# Altium PCB Board.PcbDoc
Units mm, origin at the board's own origin, x right, y up, seen from the top; angles counter-clockwise.
Board outline 180.09 x 119.89 mm, 2 copper layers (Top Layer, Bottom Layer); 170 components, 132 nets, 592 pads, 0 vias.
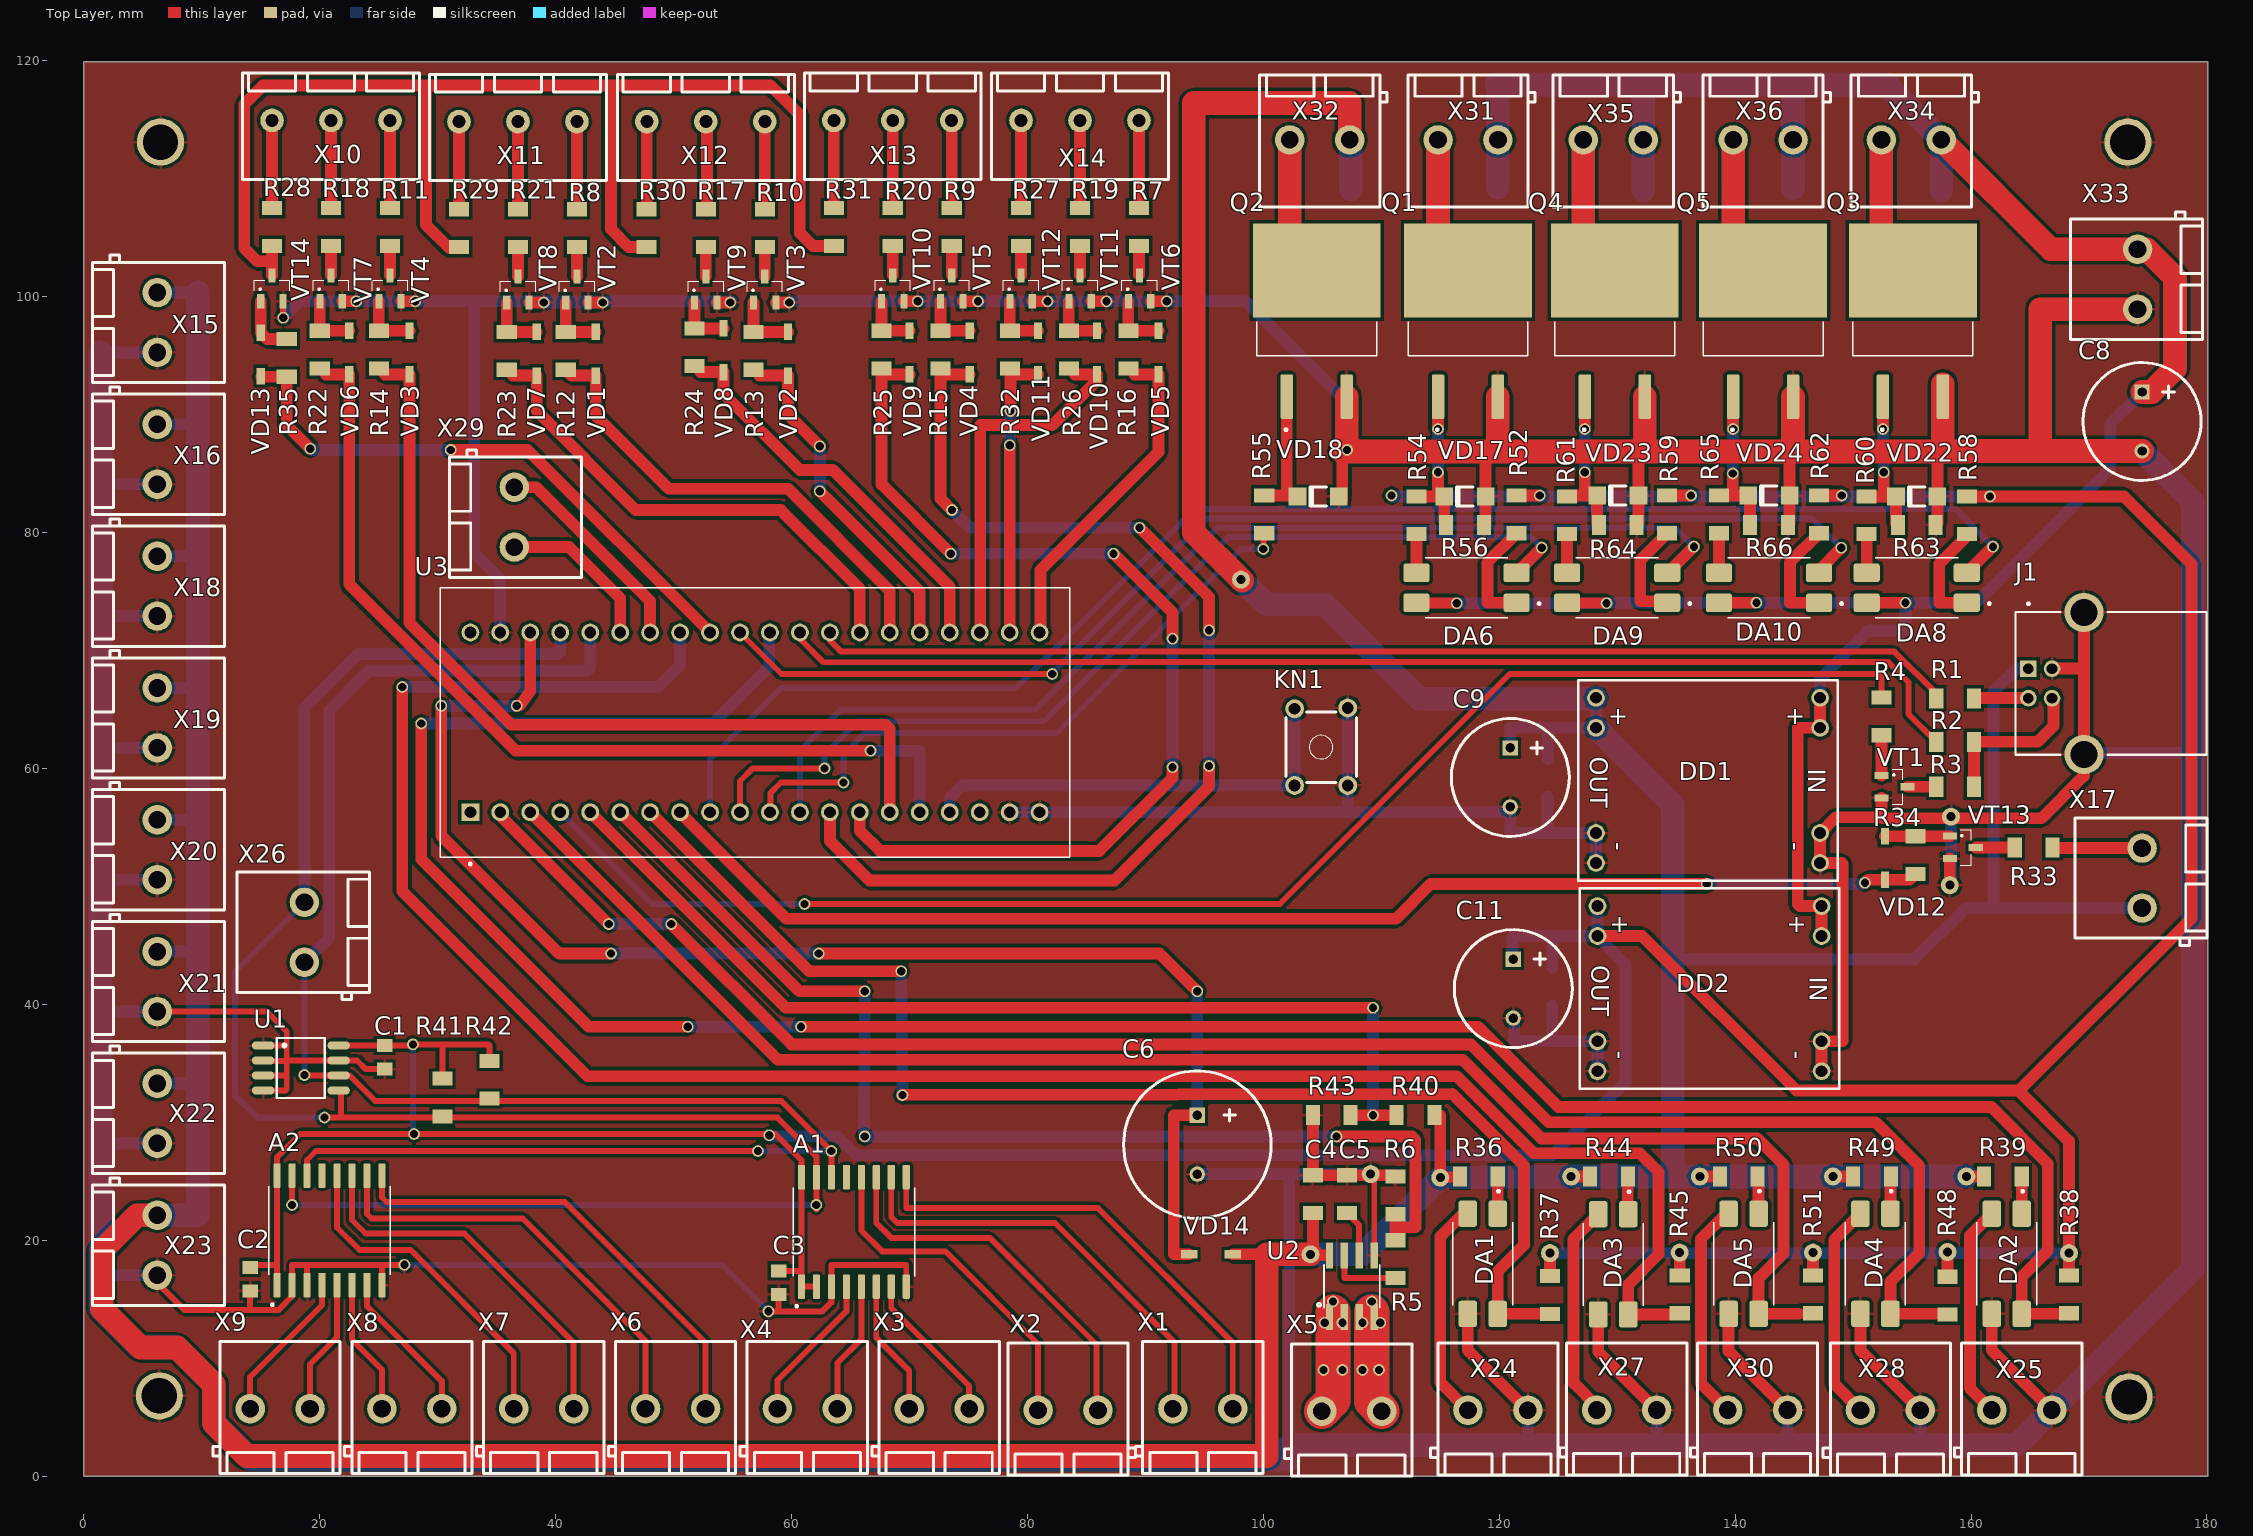
[diagram p0: Top Layer view]
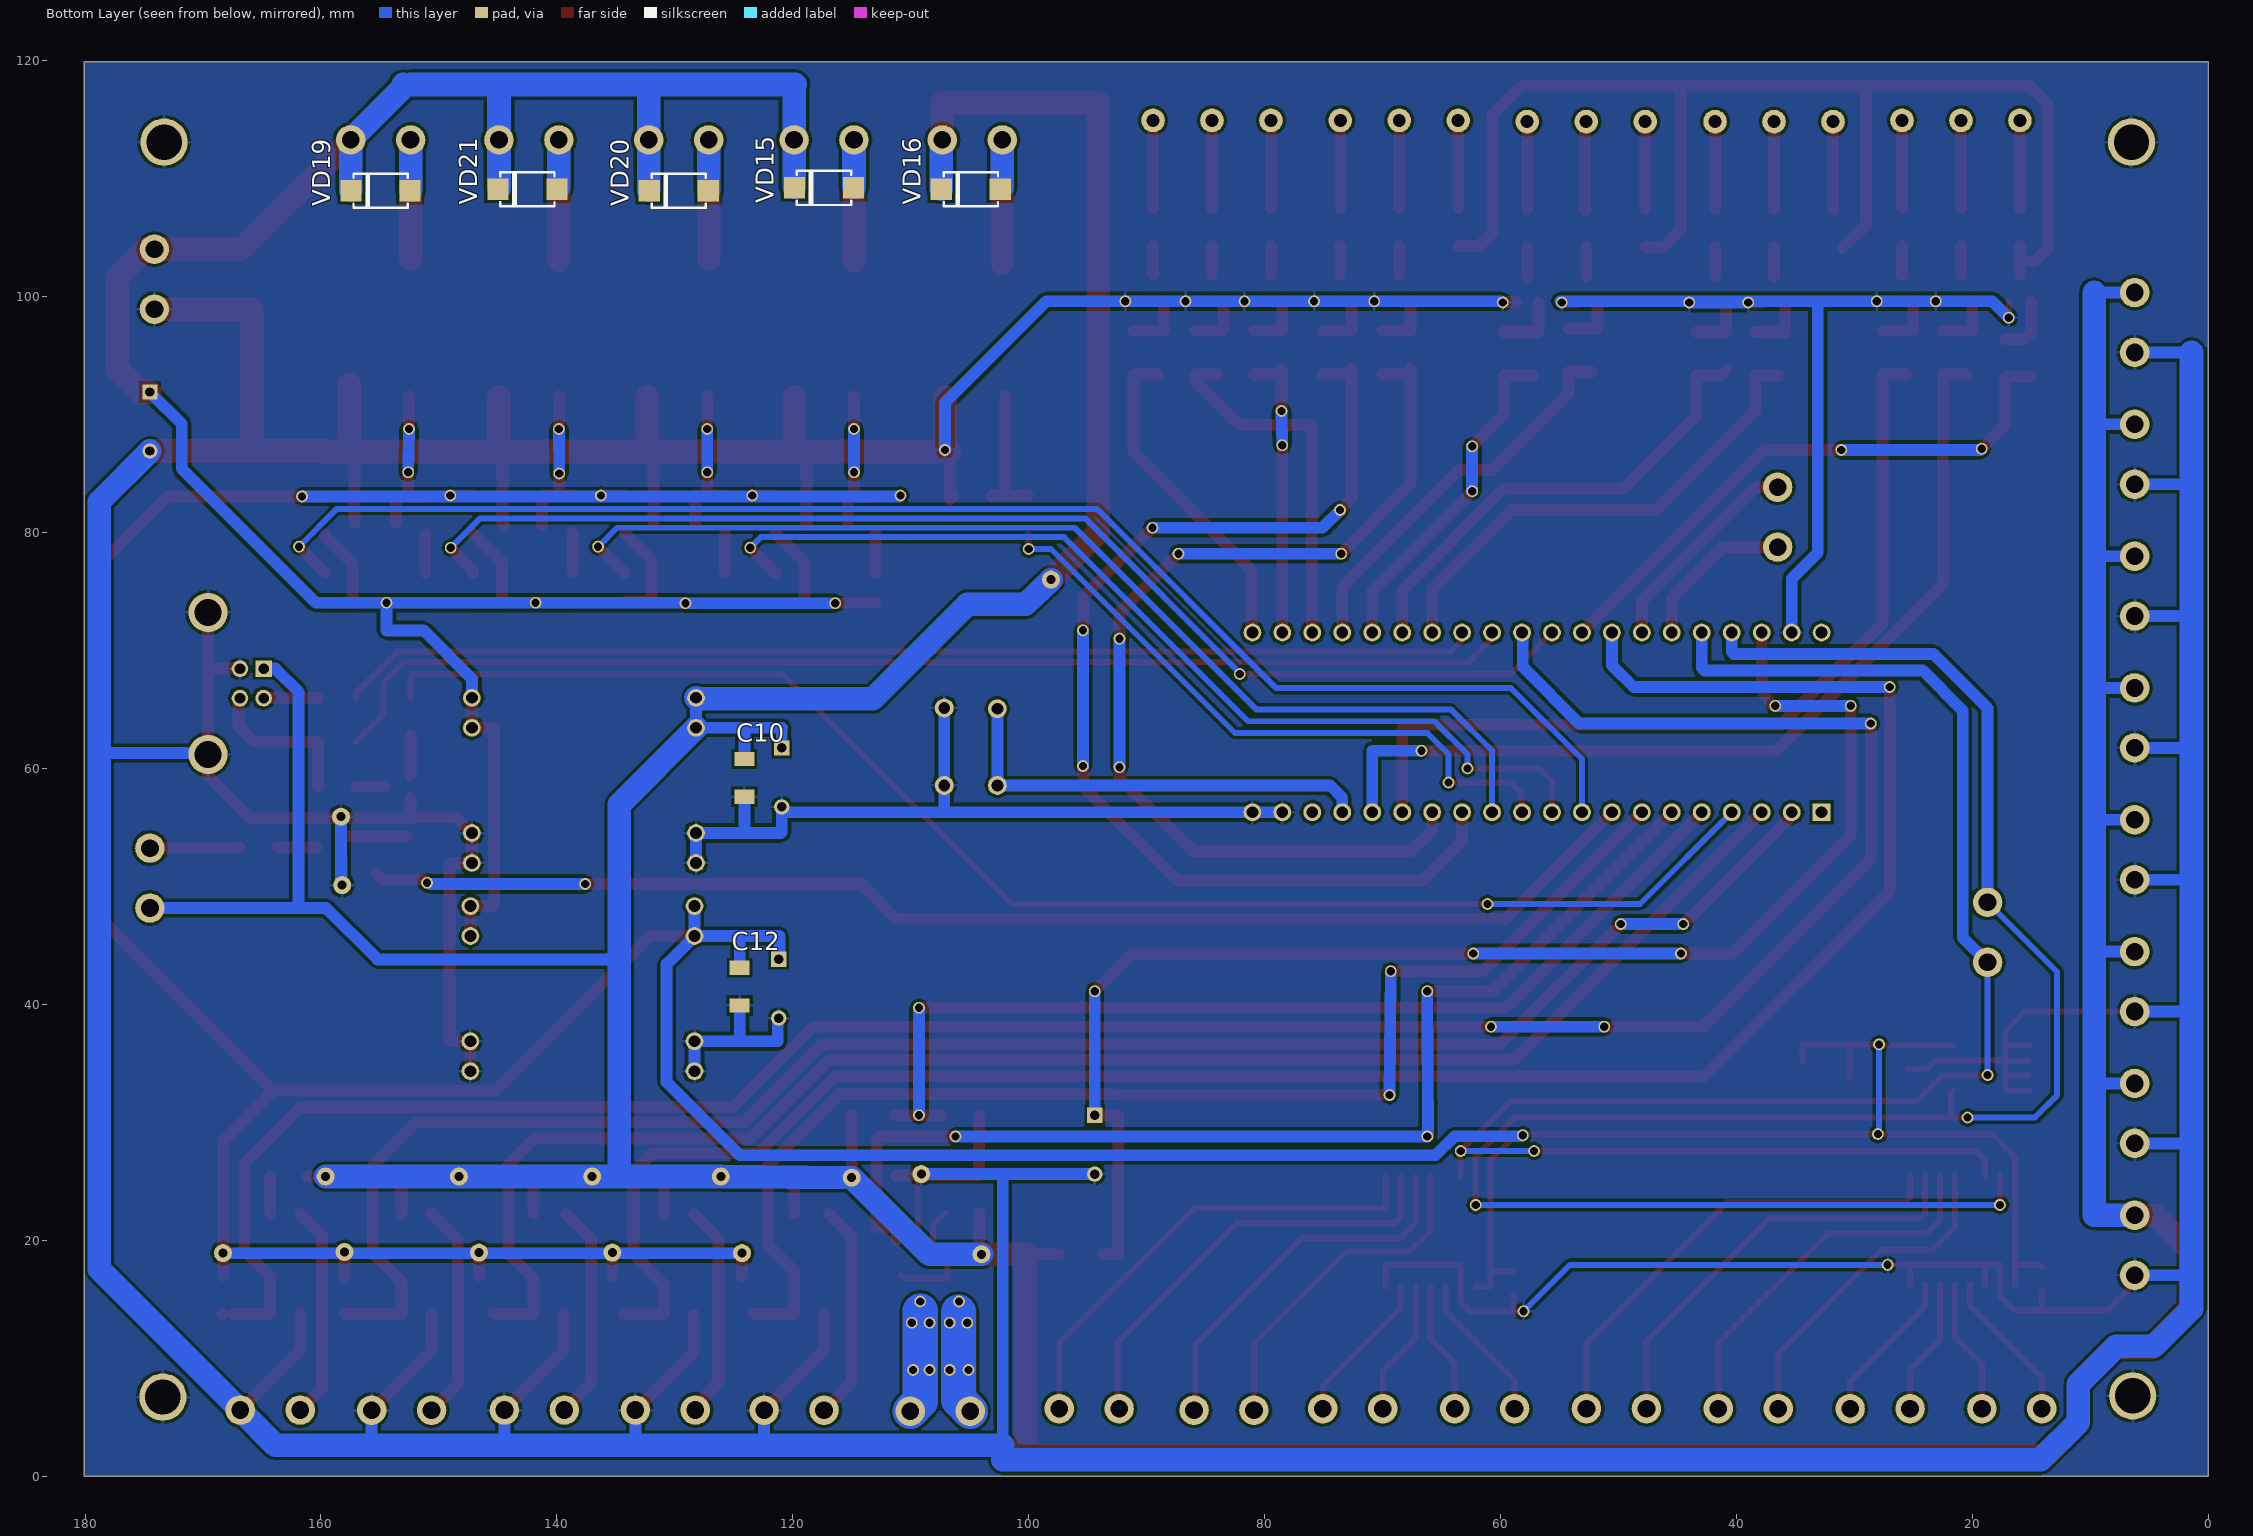
[diagram p1: Bottom Layer view, seen from below]
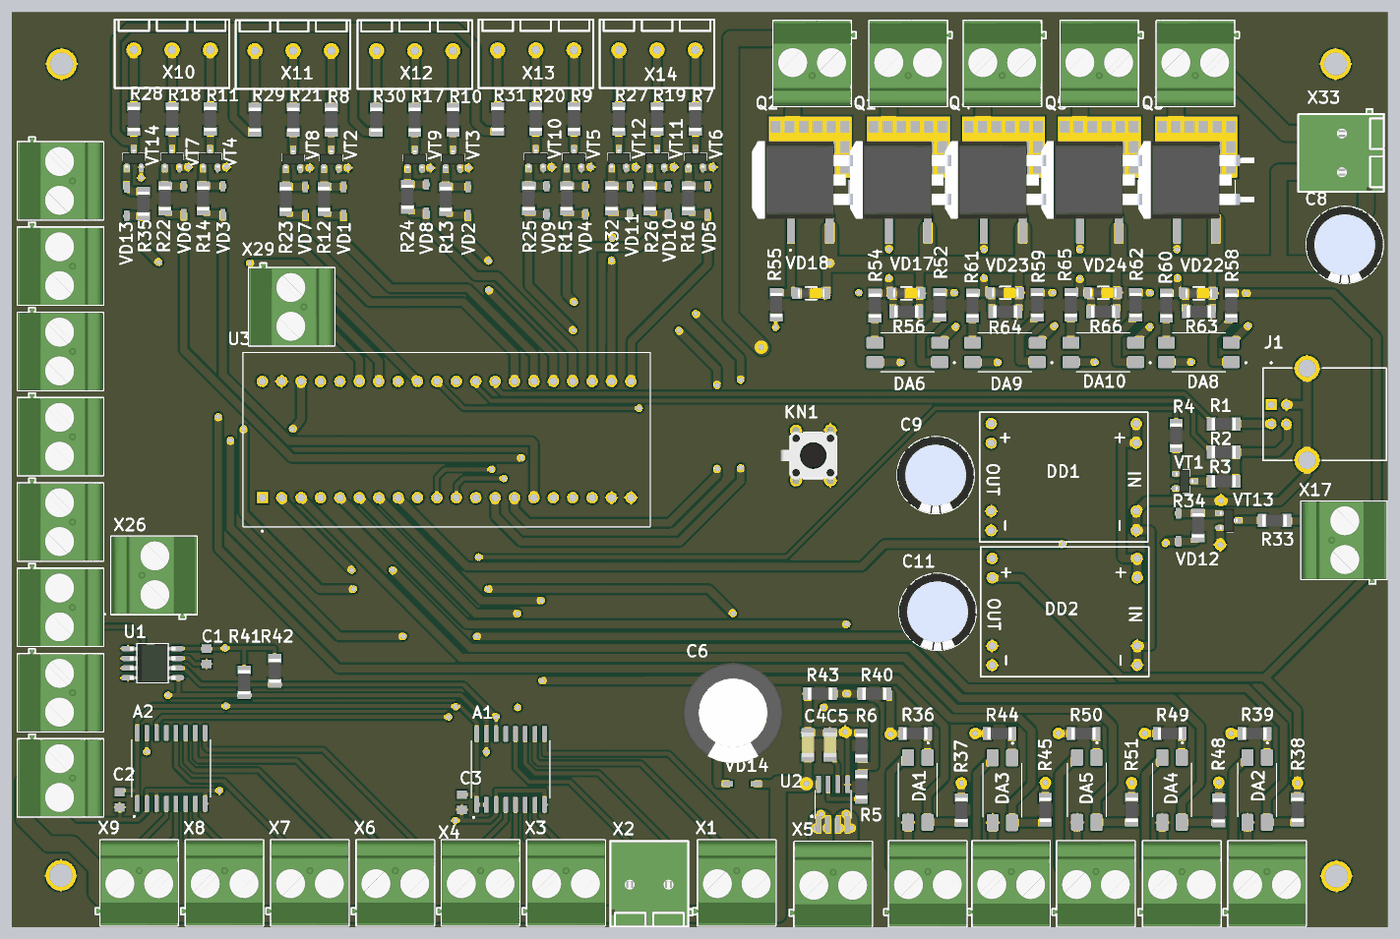
[diagram p2: 3D render of the assembled board from above, using the file's embedded part models]
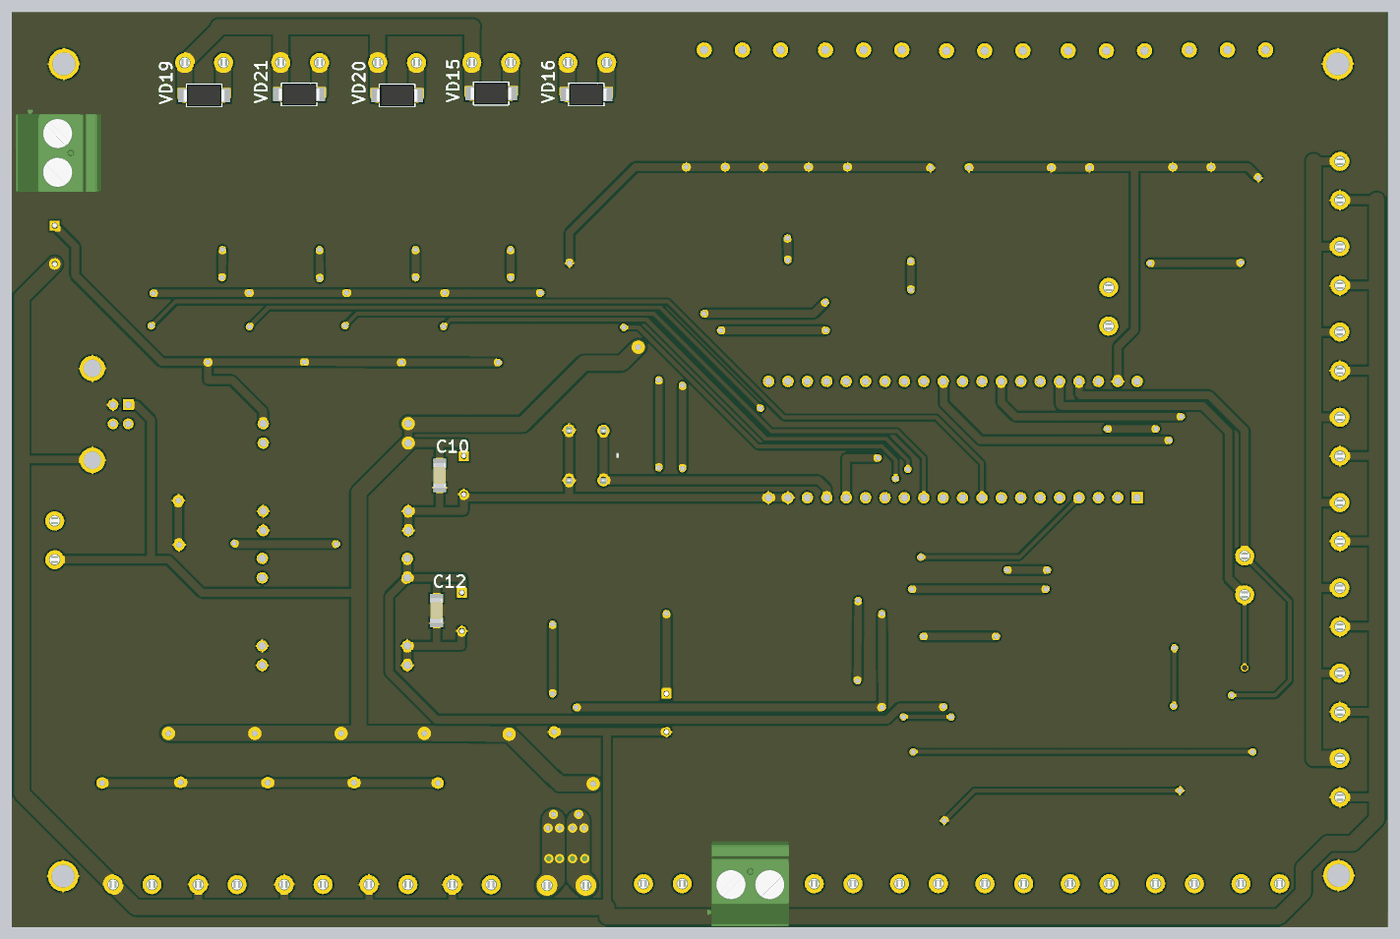
[diagram p3: 3D render of the assembled board from below, using the file's embedded part models]

## Layer stack, top to bottom
Top Solder: solder mask 0.0102, Solder Resist, Dk 3.5
Top Layer: signal copper 0.0356
Dielectric 1: dielectric 0.32, FR-4, Dk 4.8
Bottom Layer: signal copper 0.0356
Bottom Solder: solder mask 0.0102, Solder Resist, Dk 3.5

## Board outline
0,0 180.086,0 180.086,119.888 0,119.888

## Design rules (kind name [scope] priority, off if disabled: settings)
Clearance [All] p1: gap=0.254
PolygonConnect [All] p1: connectstyle=Relief reliefconductorwidth=0.254 reliefentries=4 polygonreliefangle="90 Angle" airgapwidth=0.254
RoomDefinition USB [InComponentClass('USB')] p1: confinementstyle=ConfineIn formatcopy=TRUE lockcomponents=FALSE outline -18.415,279.527 19.939,279.527 19.939,299.212 -18.415,299.212
RoomDefinition STM [InComponentClass('STM')] p2: confinementstyle=ConfineIn formatcopy=TRUE lockcomponents=FALSE outline -18.415,219.202 238.633,219.202 238.633,278.257 -18.415,278.257
RoomDefinition PWR_IN [InComponentClass('PWR_IN')] p3: confinementstyle=ConfineIn formatcopy=TRUE lockcomponents=FALSE outline -18.415,192.913 75.692,192.913 75.692,218.059 -18.415,218.059
RoomDefinition OUT_RELE [InComponentClass('OUT_RELE')] p4: confinementstyle=ConfineIn formatcopy=TRUE lockcomponents=FALSE outline -18.415,170.688 318.516,170.688 318.516,191.643 -18.415,191.643
RoomDefinition OUT_MOT [InComponentClass('OUT_MOT')] p5: confinementstyle=ConfineIn formatcopy=TRUE lockcomponents=FALSE outline -18.415,151.13 466.852,151.13 466.852,169.418 -18.415,169.418
RoomDefinition IN_PIN [InComponentClass('IN_PIN')] p6: confinementstyle=ConfineIn formatcopy=TRUE lockcomponents=FALSE outline -18.415,135.636 163.449,135.636 163.449,149.987 -18.415,149.987
RoutingVias [All] p1: holewidth=0.711 width=1.27 viastyle="Through Hole" minholewidth=0.711 minwidth=1.27 maxholewidth=0.711 maxwidth=1.27
SolderMaskExpansion [All] p1: expansion=0.102
Width [All] p1: maxlimit=3 minlimit=0.254 preferedwidth=0.5
30 further rules are at their usual default settings.

## Classes and differential pairs
component class USB: J1 R1 R2 R3 R4 VT1
component class STM: C6 DA1 DA2 DA3 DA4 DA5 KN1 R36 R37 R38 R39 R40 R41 R42 R43 R44 R45 R48 R49 R50 R51 U3 VD14 X24 X25 X26 X27 X28 X29 X30
component class PWR_IN: C8 C9 C10 C11 C12 DD1 DD2 X33
component class OUT_RELE: DA6 DA8 DA9 DA10 Q1 Q2 Q3 Q4 Q5 R52 R54 R55 R56 R58 R59 R60 R61 R62 R63 R64 R65 R66 VD15 VD16 VD17 VD18 VD19 VD20 VD21 VD22 VD23 VD24 X31 X32 X34 X35 X36
component class OUT_MOT: R7 R8 R9 R10 R11 R12 R13 R14 R15 R16 R17 R18 R19 R20 R21 R22 R23 R24 R25 R26 R27 R28 R29 R30 R31 R32 R33 R34 R35 VD1 VD2 VD3 VD4 VD5 VD6 VD7 VD8 VD9 VD10 VD11 VD12 VD13 VT2 VT3 VT4 VT5 VT6 VT7 VT8 VT9 VT10 VT11 VT12 VT13 VT14 X10 X11 X12 X13 X14 X15 X16 X17 X18 X19 X20 X21 X22 X23
component class IN_PIN: A1 A2 C1 C2 C3 C4 C5 R5 R6 U1 U2 X1 X2 X3 X4 X5 X6 X7 X8 X9

## Components (designator, comment, footprint, x,y, rotation, side; value= is the part's Value field where it differs from the comment)
A1 "PCF8574DW" SOIC127P1030X265-16N 65.278,20.701 r90 top
A2 "PCF8574DW" SOIC127P1030X265-16N 20.828,20.828 r90 top
C1 "0.1 мкФ" C_0805 25.5,35.505 r270 top
C2 "0.1 мкФ" C_0805 14.1,16.7 r270 top
C3 "0.1 мкФ" C_0805 58.9,16.4 r270 top
C4 "0.1 мкФ" C_1206 104.2,23.9 r90 top
C5 "0.1 мкФ" C_1206 107.1,23.9 r90 top
C6 "1000 мкФ" C_12.5x5 94.4,28.1 r270 top
C8 "1000 мкФ" C_10x5 174.498,89.408 r270 top
C9 "1000 мкФ" C_10x5 120.936,59.234 r270 top
C10 "0.1мкФ" C_1206 124.1,59.2 r270 bottom
C11 "1000 мкФ" C_10x5 121.19,41.327 r270 top
C12 "0.1мкФ" C_1206 124.5,41.5 r270 bottom
DA1 "PC817" SOIC254P1000X400-4N 118.6,18 r270 top
DA2 "PC817" SOIC254P1000X400-4N 163.03,18 r270 top
DA3 "PC817" SOIC254P1000X400-4N 129.667,17.955 r270 top
DA4 "PC817" SOIC254P1000X400-4N 151.892,18 r270 top
DA5 "PC817" SOIC254P1000X400-4N 140.716,18 r270 top
DA6 "PC817" SOIC254P1000X400-4N 117.221,75.311 r180 top
DA8 "PC817" SOIC254P1000X400-4N 155.394,75.311 r180 top
DA9 "PC817" SOIC254P1000X400-4N 129.994,75.311 r180 top
DA10 "PC817" SOIC254P1000X400-4N 142.867,75.311 r180 top
DD1 "LM2596" LM2596 137.7,58.98 r270 top
DD2 "LM2596" LM2596 137.827,41.327 r270 top
J1 "USBB" SAMTEC_USB-B-S-X-X-TH 169.564,67.206 r90 top
KN1 "TS-A2PG-130" TS-A2PG-130 104.9,61.8 r270 top
Q1 "IRFZ44N" DPAK254P1524X483-3N 117.348,97.917 r90 top
Q2 "IRFZ44N" DPAK254P1524X483-3N 104.521,97.917 r90 top
Q3 "IRFZ44N" DPAK254P1524X483-3N 155.067,97.917 r90 top
Q4 "IRFZ44N" DPAK254P1524X483-3N 129.794,97.917 r90 top
Q5 "IRFZ44N" DPAK254P1524X483-3N 142.367,97.917 r90 top
R1 "100" R_1206 158.642,65.936 r0 top
R2 "100" R_1206 158.642,62.253 r0 top
R3 "1.5K" R_1206 158.642,58.443 r180 top
R4 "1K" R_1206 152.419,64.412 r270 top
R5 "5.1K" R_1206 111.2,18.4 r90 top
R6 "10K" R_1206 111.2,23.8 r90 top
R7 "130" R_1206 89.455,105.9 r90 top
R8 "130" R_1206 41.805,105.8 r90 top
R9 "130" R_1206 73.58,105.9 r90 top
R10 "130" R_1206 57.73,105.8 r90 top
R11 "130" R_1206 25.955,105.9 r90 top
R12 "130" R_1206 40.855,95.4 r90 top
R13 "130" R_1206 56.78,95.4 r90 top
R14 "130" R_1206 25.005,95.5 r90 top
R15 "130" R_1206 72.63,95.5 r90 top
R16 "130" R_1206 88.55,95.5 r90 top
R17 "130" R_1206 52.73,105.8 r90 top
R18 "130" R_1206 20.955,105.9 r90 top
R19 "130" R_1206 84.455,105.9 r90 top
R20 "130" R_1206 68.58,105.9 r90 top
R21 "130" R_1206 36.805,105.8 r90 top
R22 "130" R_1206 20,95.5 r90 top
R23 "130" R_1206 35.855,95.4 r90 top
R24 "130" R_1206 51.78,95.7 r90 top
R25 "130" R_1206 67.63,95.5 r90 top
R26 "130" R_1206 83.505,95.5 r90 top
R27 "130" R_1206 79.455,105.9 r90 top
R28 "130" R_1206 15.955,105.9 r90 top
R29 "130" R_1206 31.805,105.8 r90 top
R30 "130" R_1206 47.7,105.8 r90 top
R31 "130" R_1206 63.58,105.9 r90 top
R32 "130" R_1206 78.505,95.5 r90 top
R33 "0" R_1206 165.3,53.3 r180 top
R34 "130" R_1206 155.3,52.65 r90 top
R35 "130" R_1206 17.2,94.8 r90 top
R36 "360" R_1206 118.27,25.4 r0 top
R37 "100" R_1206 124.3,15.355 r270 top
R38 "100" R_1206 168.3,15.4 r270 top
R39 "360" R_1206 162.7,25.4 r0 top
R40 "5.1K" R_1206 112.9,30.6 r180 top
R41 "10K" R_1206 34.4,33.6 r270 top
R42 "10K" R_1206 30.4,32.1 r270 top
R43 "10K" R_1206 105.8,30.6 r0 top
R44 "360" R_1206 129.3,25.4 r0 top
R45 "100" R_1206 135.3,15.4 r270 top
R48 "100" R_1206 158,15.3 r270 top
R49 "360" R_1206 151.6,25.4 r0 top
R50 "360" R_1206 140.3,25.4 r0 top
R51 "100" R_1206 146.6,15.4 r270 top
R52 "100" R_1206 121.466,81.534 r270 top
R54 "3K" R_1206 112.976,81.458 r270 top
R55 "3K" R_1206 100.076,81.534 r270 top
R56 "2.2K" R_1206 117.094,80.645 r180 top
R58 "100" R_1206 159.639,81.458 r270 top
R59 "100" R_1206 134.239,81.534 r270 top
R60 "3K" R_1206 151.149,81.458 r270 top
R61 "3K" R_1206 125.749,81.458 r270 top
R62 "100" R_1206 147.112,81.534 r270 top
R63 "2.2K" R_1206 155.394,80.645 r180 top
R64 "2.2K" R_1206 130.048,80.645 r180 top
R65 "3K" R_1206 138.622,81.534 r270 top
R66 "2.2K" R_1206 142.867,80.645 r180 top
U1 "AT24C256C-SSHL-B" SOIC8 18.4,34.6 r0 top
U2 "ACS712" SO08 107.5,16.1 r0 top
U3 "STM32F103-BluePill" MODULE_ZC323000 56.9,63.9 r90 top
VD1 "MBR0520LT1G" SOD-123 43.4,95.15 r270 top
VD2 "MBR0520LT1G" SOD-123 59.7,95.15 r270 top
VD3 "MBR0520LT1G" SOD-123 27.6,95.25 r270 top
VD4 "MBR0520LT1G" SOD-123 75.1,95.25 r270 top
VD5 "MBR0520LT1G" SOD-123 91.1,95.25 r270 top
VD6 "MBR0520LT1G" SOD-123 22.495,95.25 r270 top
VD7 "MBR0520LT1G" SOD-123 38.4,95.15 r270 top
VD8 "MBR0520LT1G" SOD-123 54.23,95.45 r270 top
VD9 "MBR0520LT1G" SOD-123 70,95.25 r270 top
VD10 "MBR0520LT1G" SOD-123 85.9,95.25 r270 top
VD11 "MBR0520LT1G" SOD-123 80.9,95.25 r270 top
VD12 "MBR0520LT1G" SOD-123 152.7,52.4 r270 top
VD13 "MBR0520LT1G" SOD-123 15,95.1 r270 top
VD14 "1N4148W" SOD-123 95.559,18.8 r180 top
VD15 "SMA4007" "SMA (DO-214AC)" 117.348,109.22 r0 bottom
VD16 "SMA4007" "SMA (DO-214AC)" 104.902,109.093 r0 bottom
VD17 "3.9В" DL-35 117.094,83.058 r180 top
VD18 "3.9В" DL-35 104.648,83.058 r180 top
VD19 "SMA4007" "SMA (DO-214AC)" 154.94,108.966 r0 bottom
VD20 "SMA4007" "SMA (DO-214AC)" 129.667,108.966 r0 bottom
VD21 "SMA4007" "SMA (DO-214AC)" 142.494,109.093 r0 bottom
VD22 "3.9В" DL-35 155.394,83.058 r180 top
VD23 "3.9В" DL-35 130.048,83.134 r180 top
VD24 "3.9В" DL-35 142.867,83.134 r180 top
VT1 "BC847" SOT23 153.519,58.443 r0 top
VT2 "2N7002.215" SOT23 41.805,100.6 r90 top
VT3 "2N7002.215" SOT23 57.73,100.6 r90 top
VT4 "2N7002.215" SOT23 25.955,100.7 r90 top
VT5 "2N7002.215" SOT23 73.58,100.7 r90 top
VT6 "2N7002.215" SOT23 89.5,100.7 r90 top
VT7 "2N7002.215" SOT23 20.955,100.7 r90 top
VT8 "2N7002.215" SOT23 36.805,100.6 r90 top
VT9 "2N7002.215" SOT23 52.73,100.6 r90 top
VT10 "2N7002.215" SOT23 68.58,100.7 r90 top
VT11 "2N7002.215" SOT23 84.455,100.7 r90 top
VT12 "2N7002.215" SOT23 79.455,100.7 r90 top
VT13 "2N7002.215" SOT23 159.3,53.3 r0 top
VT14 "2N7002.215" SOT23 15.95,100.7 r90 top
X1 "DG508V-02" DG508V-02 94.869,5.715 r0 top
X2 "DG508V-02" DG508V-02 83.439,5.588 r180 top
X3 "DG508V-02" DG508V-02 72.517,5.715 r0 top
X4 "DG508V-02" DG508V-02 61.341,5.715 r0 top
X5 "DG508V-02" DG508V-02 107.5,5.5 r0 top
X6 "DG508V-02" DG508V-02 50.165,5.715 r0 top
X7 "DG508V-02" DG508V-02 38.989,5.715 r0 top
X8 "DG508V-02" DG508V-02 27.813,5.715 r0 top
X9 "DG508V-02" DG508V-02 16.637,5.715 r0 top
X10 "300-031-12" 300-031-12 20.955,114.935 r180 top
X11 "300-031-12" 300-031-12 36.805,114.835 r180 top
X12 "300-031-12" 300-031-12 52.73,114.835 r180 top
X13 "300-031-12" 300-031-12 68.58,114.935 r180 top
X14 "300-031-12" 300-031-12 84.455,114.935 r180 top
X15 "DG508V-02" DG508V-02 6.223,97.805 r270 top
X16 "DG508V-02" DG508V-02 6.223,86.629 r270 top
X17 "DG508V-02" DG508V-02 174.5,50.7 r90 top
X18 "DG508V-02" DG508V-02 6.223,75.453 r270 top
X19 "DG508V-02" DG508V-02 6.223,64.277 r270 top
X20 "DG508V-02" DG508V-02 6.223,53.101 r270 top
X21 "DG508V-02" DG508V-02 6.223,41.925 r270 top
X22 "DG508V-02" DG508V-02 6.223,30.749 r270 top
X23 "DG508V-02" DG508V-02 6.223,19.573 r270 top
X24 "DG508V-02" DG508V-02 119.888,5.588 r0 top
X25 "DG508V-02" DG508V-02 164.3,5.6 r0 top
X26 "DG508V-02" DG508V-02 18.7,46.1 r90 top
X27 "DG508V-02" DG508V-02 130.8,5.6 r0 top
X28 "DG508V-02" DG508V-02 153.162,5.588 r0 top
X29 "DG508V-02" DG508V-02 36.5,81.3 r270 top
X30 "DG508V-02" DG508V-02 141.9,5.6 r0 top
X31 "DG508V-02" DG508V-02 117.348,113.284 r180 top
X32 "DG508V-02" DG508V-02 104.775,113.284 r180 top
X33 "DG508V-02" DG508V-02 174.117,101.473 r270 top
X34 "DG508V-02" DG508V-02 154.94,113.284 r180 top
X35 "DG508V-02" DG508V-02 129.667,113.284 r180 top
X36 "DG508V-02" DG508V-02 142.367,113.284 r180 top

## Footprints (in the part's own frame and the unit in brackets; to place one, negate y for a bottom-side part, rotate by r counter-clockwise, add the part's x,y. Pads: shape width x height; smd on the part's side, far side on the other; paste and mask are expansions set on the pad)
300-031-12 [mm] "шаг 5 мм"
  round 2 hole 1.1: 1(-5,0) 2(0,0) 3(5,0)
  silkscreen extent -7.5,-4 7.5,5
C_10x5 [mm] "в отверстие"
  rect 1.3x1.3 hole 0.8: 1(-2.5,0)
  round 1.3 hole 0.8: 2(2.5,0)
  silkscreen extent -5,-5 5,5, body extent -5.04,-5.06 5.08,5.06, height 13.2
C_12.5x5 [mm] "в отверстие"
  rect 1.3x1.3 hole 0.8: 1(-2.5,0)
  round 1.3 hole 0.8: 2(2.5,0)
  silkscreen extent -6.25,-6.25 6.25,6.25, body extent -6.6,-6.6 6.6,6.6, height 25.4
C_0805 [mm] "SMD"
  rect 1.1x1.3 smd: 1(-1,0) 2(1,0)
  body extent -1,-0.62 1,0.63, height 0.6
C_1206 [mm] "SMD"
  rect 1.2x1.7 smd: 1(-1.6,0) 2(1.6,0)
  body extent -1.6,-0.8 1.6,0.8, height 0.76
DG508V-02 [mm] "шаг 5,08 мм"
  round 2.5 hole 1.5: 1(-2.54,0) 2(2.54,0)
  silkscreen extent -5.7,-5.5 5.1,5.7, body extent -5.63,-5.5 5.1,5.7, height 18.3
DL-35 [mm] "SMD"
  rect 1.5x1.5 smd: 1(-1.75,0) 2(1.75,0)
  silkscreen extent -0.7,-0.8 0.7,0.8, body extent -1.75,-0.75 1.75,0.75, height 1.49
DPAK254P1524X483-3N [mm]
  rrect25% 3.78x1.06 smd: 1(-6.4,2.54) 3(-6.4,-2.54)
  rect 8x10.84 smd paste-6: 2(4.29,0)
  silkscreen extent -9.3,-5.08 -0.05,5.08, body extent -5.08,-7.62 5.08,7.62, height 4.83
LM2596 [mm] "Модуль DC-DC"
  round 1.5 hole 1: 1(-7,9.5) 2(-4.46,9.5) 3(4.46,9.5) 4(7,9.5) 5(-7,-9.5) 6(-4.46,-9.5) 7(4.46,-9.5) 8(7,-9.5)
  silkscreen extent -8.5,-11 8.5,11
MODULE_ZC323000 [mm]
  rect 1.508x1.508 hole 1: 1(-7.62,24.13)
  round 1.508 hole 1: 2(-7.62,21.59) 3(-7.62,19.05) 4(-7.62,16.51) 5(-7.62,13.97) 6(-7.62,11.43) 7(-7.62,8.89) 8(-7.62,6.35) 9(-7.62,3.81) 10(-7.62,1.27) 11(-7.62,-1.27) 12(-7.62,-3.81) 13(-7.62,-6.35) 14(-7.62,-8.89) 15(-7.62,-11.43) 16(-7.62,-13.97) 17(-7.62,-16.51) 18(-7.62,-19.05) 19(-7.62,-21.59) 20(-7.62,-24.13) 21(7.62,-24.13) 22(7.62,-21.59) 23(7.62,-19.05) 24(7.62,-16.51) 25(7.62,-13.97) 26(7.62,-11.43) 27(7.62,-8.89) 28(7.62,-6.35) 29(7.62,-3.81) 30(7.62,-1.27) 31(7.62,1.27) 32(7.62,3.81) 33(7.62,6.35) 34(7.62,8.89) 35(7.62,11.43) 36(7.62,13.97) 37(7.62,16.51) 38(7.62,19.05) 39(7.62,21.59) 40(7.62,24.13)
  silkscreen extent -12.1,-26.67 11.43,26.67
R_1206 [mm] "SMD"
  rect 1.2x1.7 smd: 1(-1.6,0) 2(1.6,0)
  body extent -1.6,-0.8 1.6,0.8, height 0.6
SAMTEC_USB-B-S-X-X-TH [mm]
  rect 1.408x1.408 hole 0.9: 1(1.25,4.7)
  round 1.408 hole 0.9: 2(-1.25,4.7) 3(-1.25,2.7) 4(1.25,2.7)
  round 3.316 hole 2.3: S1(-6.02,0) S2(6.02,0)
  silkscreen extent -6.05,-10.4 6.85,5.8
"SMA (DO-214AC)" [mm] "SMD"
  rect 1.8x1.8 smd: A(-2.5,0) K(2.5,0)
  silkscreen extent -2.3,-1.45 2.3,1.45, body extent -2.8,-1.45 2.8,1.45, height 2.4
SO08 [mil]
  rect 24x87 smd: 1(-75,-103) 2(-25,-103) 3(25,-103) 4(75,-103) 5(75,103) 6(25,103) 7(-25,103) 8(-75,103)
  silkscreen extent -115,-71 93,71
SOD-123 [mm] "SMD"
  rect 1.4x0.7 smd: A(-1.85,0) K(1.85,0)
  body extent -1.95,-0.9 1.95,0.9, height 1.18
SOIC8 [mm]
  oval 1.9x0.7 smd: 1(-3.2,1.905) 2(-3.2,0.635) 3(-3.2,-0.635) 4(-3.2,-1.905) 5(3.2,-1.905) 6(3.2,-0.635) 7(3.2,0.635) 8(3.2,1.905)
  silkscreen extent -2.03,-2.54 2.03,2.54, body extent -3,-2.54 3,2.54, height 1.7
SOIC127P1030X265-16N [mm]
  rrect25% 2.06x0.6 smd: 1(-4.64,4.445) 2(-4.64,3.175) 3(-4.64,1.905) 4(-4.64,0.635) 5(-4.64,-0.635) 6(-4.64,-1.905) 7(-4.64,-3.175) 8(-4.64,-4.445) 9(4.64,-4.445) 10(4.64,-3.175) 11(4.64,-1.905) 12(4.64,-0.635) 13(4.64,0.635) 14(4.64,1.905) 15(4.64,3.175) 16(4.64,4.445)
  silkscreen extent -6.4,-5.15 3.75,5.15
SOIC254P1000X400-4N [mm]
  rrect25% 2.22x1.57 smd: 1(-4.245,1.27) 2(-4.245,-1.27) 3(4.245,-1.27) 4(4.245,1.27)
  silkscreen extent -6.25,-2.54 3.5,2.54
SOT23 [mm] "SMD"
  rect 1.2x0.6 smd: 1(-1.1,0.95) 2(-1.1,-0.95) 3(1.1,0)
  silkscreen extent -0.2,-1.5 0.7,1.5, body extent -1.15,-1.5 1.15,1.5, height 1.1
TS-A2PG-130 [mm] "Кнопка 5 мм"
  round 1.6 hole 1: 1(-3.32,2.25) 2(3.25,2.25) 3(-3.25,-2.25) 4(3.25,-2.25)
  silkscreen extent -3,-3 3,3, body extent -3.75,-4.25 3.75,3, height 5

## Part data
A1 A2: "Remote 8-Bit I/O Expander for I2C-Bus 16-SOIC -40 to 85"
C1 C2 C3: library part "Конденсатор 0805", "SMD"
C4 C5: library part "Конденсатор 0603", "SMD"
C6: library part "Конденсатор 16х7.5", "К50-35"
C8 C9 C11: library part "Конденсатор 25х12.5", "К50-35"
C10 C12: library part "Конденсатор 1210", "SMD"
DA1 DA2 DA3 DA4 DA5 DA6 DA8 DA9 DA10: library part KPC357NT, "оптрон, SMD"
DD1 DD2: "Блок питания"
J1: library part USB-B-S-X-X-TH, "USB-B (USB TYPE-B) USB 2.0 Receptacle Connector 4 Position Through Hole, Right Angle"
KN1: library part "TS-A2PG-130 (5-й вывод)", "Кнопка 5 мм"
Q1 Q2 Q3 Q4 Q5: library part IRFZ44NSTRRPBF, "N-Channel 55V 49A (Tc) 3.8W (Ta), 94W (Tc) Surface Mount D2PAK"
R1 R2 R3 R4 R5 R6 R7 R8 R9 R10 R11 R12 R13 R14 R15 R16 R17 R18 R19 R20 R21 R22 R23 R24 R25 R26 R27 R28 R29 R30 R31 R32 R33 R34 R35 R36 R37 R38 R39 R40 R41 R42 R43 R44 R45 R48 R49 R50 R51 R52 R54 R55 R56 R58 R59 R60 R61 R62 R63 R64 R65 R66: library part "Резистор 1206", "0,25 Вт"
U1: "EEPROM Memory IC 256Kb _32K x 8_ IA?C 1MHz 550ns 8-SOIC"
U2: "Current Sensor 5A 1 Channel Hall Effect, Open Loop Bidirectional 8-SOIC (0.154, 3.90mm Width)"
U3: library part ZC323000, "STM32F103C8T6 ARM STM32 Minimum System Development Board Module For Arduino"
VD1 VD2 VD3 VD4 VD5 VD6 VD7 VD8 VD9 VD10 VD11 VD12 VD13 VD15 VD16 VD19 VD20 VD21: library part SMA400*, "диод, SMD"
VD14: "диод, SMD"
VD17 VD18 VD22 VD23 VD24: library part BZV55C***, "стабилитрон, SMD"
VT1: "NPN, SMD"
VT2 VT3 VT4 VT5 VT6 VT7 VT8 VT9 VT10 VT11 VT12 VT13 VT14: "MOSFET, SOT23"
X1 X2 X3 X4 X5 X6 X7 X8 X9 X15 X16 X17 X18 X19 X20 X21 X22 X23 X24 X25 X26 X27 X28 X29 X30 X31 X32 X33 X34 X35 X36: "клеммник винтовой 2к.,5.08мм"
X10 X11 X12 X13 X14: "клеммник винтовой 3к.,5мм"

## Free pads (board coordinates)
  round 1 hole 0.7: 2(17.653,22.987) 3(62.103,22.987) 4(27.9,36.6) 4(28,29) 4(57.15,27.559) 4(58.1,28.9) 5(63.373,27.559) 6(27.178,17.907) 7(58.039,13.97) 10(114.808,88.773) 11(127.254,88.773) 12(139.827,88.773) 13(152.527,88.773) 14(114.8,85.1) 15(127.254,85.1) 16(139.8,85) 17(152.6,85.1) 18(110.866,83.134) 19(123.434,83.134) 20(136.266,83.134) 21(149.034,83.134) 22(161.6,83.058) 28(154.441,74.041) 29(141.8,74.041) 30(129.1,74) 31(116.4,74) 33(105.2,13) 34(106.7,13) 35(108.4,13) 36(109.9,13) 37(105.1,9) 38(106.7,9) 39(108.4,9) 40(109.8,9) 41(105.9,14.8) 42(109.2,14.8) 58(16.9,98.2) 60(91.8,99.6) 61(86.7,99.6) 63(81.7,99.6) 64(75.8,99.6) 65(70.7,99.6) 66(44,99.5) 67(39,99.5) 68(59.8,99.5) 69(54.8,99.5) 70(28.1,99.6) 71(23.1,99.6) 72(107.1,87) 73(161.858,78.8) 74(149,78.7) 75(136.5,78.8) 76(123.6,78.715) 77(100,78.6) 80(78.5,87.4) 81(78.562,90.3) 82(62.4,87.3) 83(62.4,83.5) 84(66.7,61.5) 86(31.1,87) 87(19.2,87.1) 88(44.5,46.8) 89(49.8,46.8) 90(69.4,32.3) 91(69.3,42.8) 92(106.2,28.8) 93(66.2,41.1) 94(66.2,28.8) 95(82.1,68) 96(61.1,48.5) 97(109.3,30.6) 98(151,50.3) 99(137.6,50.2) 100(62.8,60) 101(64.4,58.8) 102(109.3,39.7) 103(94.4,41.1) 104(62.3,44.3) 105(44.7,44.3) 106(60.8,38.1) 107(51.2,38.1) 108(30.3,65.3) 109(36.7,65.3) 110(27,66.9) 112(28.6,63.8) 113(73.5,78.2) 114(73.6,81.9) 115(89.5,80.4) 116(87.3,78.2) 117(95.4,71.7) 118(92.3,71) 119(95.4,60.2) 120(92.3,60.1) 121(18.7,34) 122(20.4,30.4)
  round 1.524 hole 0.762: 43(124.3,18.9) 44(135.3,18.945) 45(146.6,18.945) 46(158,19) 48(168.3,18.9) 49(159.6,25.4) 50(148.3,25.4) 51(137,25.4) 52(126.1,25.4) 53(115,25.3) 54(109.1,25.6) 55(104,18.8) 56(158.2,50.1) 57(158.3,55.9) 127(98.1,76)
  round 4 hole 3: 123(6.5,113.1) 124(6.4,6.8) 125(173.4,6.7) 126(173.3,113.1)

## Nets (pads, with @x,y where several pads share a name; then routed paths per layer and width w, separated by ;. In a path a pad name is that pad's centre, name@x,y a point inside that pad or via, vN(x,y) a via of type N, cw(c..) or ccw(c..) an arc to the next point about the centre after c; other vN are vias at no path point)
3V: A1.1 A1.2 A1.16 A2.1 A2.16 C1.1 C2.1 C3.1 C11.1 C12.1 DD2.5 DD2.6 pad.4@27.9,36.6 pad.4@28,29 pad.4@58.1,28.9 pad.18 pad.19 pad.20 pad.21 pad.22 pad.43 pad.44 pad.45 pad.46 pad.48 R37.1 R38.1 R41.1 R42.1 R45.1 R48.1 R51.1 R52.1 R58.1 R59.1 R62.1 U1.8 | length 440.9
  Top Layer w0.5: C2.1 14.3,17.9 16.383,17.9 ; A2.1 16.383,17.9 ; U1.8 C1.1 pad.4@28.105,36.505 ; pad.4@27.9,36.6 34.3,36.6 34.4,36.5 R41.1 ; R42.1 30.4,36.4 ; C3.1 60.733,17.4 ; A1.2 A1.1 A1.16 60.833,26.797 58.63,29 28,29 18.332,29 16.383,27.051 A2.16 16.383,17.9
  Top Layer w1: R52.1 pad.19 ; R37.1 pad.43 ; DD2.6 132.113,45.787 145.2,32.7 164,32.7 164.05,32.65 ; R59.1 pad.20 ; R45.1 pad.44 ; R51.1 pad.45 ; R62.1 pad.21 ; R48.1 pad.46 ; R58.1 pad.22 172.958,83.058 178.7,77.316 178.7,47.3 164.05,32.65 ; R38.1 pad.48 168.3,28.4 164.05,32.65
  Bottom Layer w0.5: pad.4@27.9,36.6 27.9,29.1 pad.4@28,29
  Bottom Layer w1: pad.4@58.1,28.9 58.187,28.813 63.892,28.813 65.505,27.2 124.5,27.2 130.7,33.4 130.7,43.414 DD2.6 ; pad.18@110.942,83.058 pad.22 ; C11.1 121.113,43.904 121.113,45.787 124.6,45.787 ; pad.43 pad.48 ; C12.1 124.5,45.687 124.6,45.787 ; DD2.5 DD2.6 ; 124.6,45.787 DD2.6
5V: C4.1 C9.1 C10.1 DD1.5 DD1.6 J1.1 pad.49 pad.50 pad.51 pad.52 pad.53 pad.55 pad.127 R36.1 R39.1 R40.1 R44.1 R49.1 R50.1 U2.8 VD14.A VD16.K X15.1 X16.1 X17.1 X18.1 X19.1 X20.1 X21.1 X22.1 X23.1 X32.1 | length 538.2
  Top Layer w1: VD14.A 100.3,18.8 ; C4.1 104.2,18.716 U2.8@105.3,18.716 ; R40.1@115,30.6 pad.53 R36.1 ; pad.52 R44.1 ; pad.51 R50.1 ; pad.50 R49.1 ; pad.49 R39.1
  Top Layer w2: X23.1 4.513,22.113 1.5,19.1 1.5,14.2 4.8,10.9 7.9,10.9 11,7.8 11,4.5 13.8,1.7 100.3,1.7 100.3,18.8 pad.55 ; pad.127@98.2,75.9 pad.127 94.1,80 94.1,116.415 107.315,116.415 X32.1
  Bottom Layer w1: X22.1 9.555,33.289 ; X21.1 9.652,44.465 ; X20.1 9.652,55.641 ; X19.1 9.555,66.817 ; X18.1 9.652,77.993 ; X16.1 9.652,89.169 ; X15.1 9.667,100.345 ; X32.1 X32.1@107.402,113.197 ; C9.1 120.936,63.404 120.9,63.44 124.2,63.44 ; C10.1 124.1,63.34 124.2,63.44 ; DD1.5 DD1.6 124.2,63.44 ; 134.7,43.8 155.2,43.8 159.56,48.16 161.9,48.16 ; J1.1 163.856,68.456 161.9,66.5 161.9,48.16 ; X17.1 161.9,48.16
  Bottom Layer w2: X23.1 9.667,22.113 9.667,100.345 ; pad.127 100.3,73.9 105.2,73.9 113.2,65.9 128.12,65.9 DD1.5 ; pad.55 108.4,18.8 pad.53 pad.52 134.7,25.4 ; VD16.K X32.1@107.402,113.197 ; DD1.6 134.7,56.94 134.7,43.8 134.7,25.4 ; pad.49 pad.50 pad.51 134.7,25.4
GND: A1.3 A1.8 A2.2 A2.3 A2.8 C1.2 C2.2 C3.2 C4.2 C5.2 C6.2 C8.2 C9.2 C10.2 C11.2 C12.2 DA1.3 DA2.3 DA3.3 DA4.3 DA5.3 DD1.3 DD1.4 DD1.7 DD1.8 DD2.3 DD2.4 DD2.7 DD2.8 J1.4 J1.S1 J1.S2 KN1.1 KN1.2 pad.6 pad.7 pad.54 pad.56 pad.57 pad.58 pad.60 pad.61 pad.63 pad.64 pad.65 pad.66 pad.67 pad.68 pad.69 pad.70 pad.71 pad.72 pad.123 pad.124 pad.125 pad.126 Q1.3 Q2.3 Q3.3 Q4.3 Q5.3 R6.2 R43.1 R56.1 R63.1 R64.1 R66.1 U1.1 U1.2 U1.3 U1.4 U1.7 U2.5 U3.19 U3.20 U3.39 VD17.1 VD18.1 VD22.1 VD23.1 VD24.1 VT1.2 VT2.2 VT3.2 VT4.2 VT5.2 VT6.2 VT7.2 VT8.2 VT9.2 VT10.2 VT11.2 VT12.2 VT13.2 VT14.2 X15.2 X16.2 X18.2 X19.2 X20.2 X21.2 X22.2 X23.2 X24.2 X25.2 X27.2 X28.2 X30.2 X33.2 | length 1060.8
  Top Layer w0.5: X23.2 6.223,16.383 8.509,14.097 16.51,14.097 17.653,15.24 A2.2 17.653,17.907 25.273,17.907 ; X21.2 15.515,39.385 17.2,37.7 17.2,36.505 ; 14.1,14.197 C2.2 ; U1.4 17.095,32.695 17.2,32.8 17.2,34 ; U1.3 17.165,33.965 17.2,34 ; U1.2 15.235,35.2 17.2,35.2 ; U1.1 17.2,36.505 ; pad.58 VT14.2 ; A2.3 18.923,17.78 ; A2.8 25.273,17.907 ; C1.2 23.895,34.505 23.165,35.235 U1.7 17.235,35.235 17.2,35.2 ; pad.6@26.924,17.907 25.273,17.907 ; pad.7@58.3,13.97 62.611,13.97 63.373,14.732 A1.3 63.373,17.907 69.723,17.907 A1.8 ; 58.9,14.07 C3.2 ; U2.5 pad.54@109.405,25.495 ; 17.2,34 17.2,35.2 ; 17.2,35.2 17.2,36.505
  Top Layer w1: VT7.2 pad.71@22.9,99.6 ; VT4.2 pad.70 ; VT8.2 pad.67@38.8,99.5 ; VT2.2 pad.66@43.8,99.5 ; VT9.2 pad.69 ; VT3.2 pad.68 ; VT10.2 pad.65 ; VT5.2 pad.64 ; VT12.2 pad.63 ; VT11.2 pad.61 ; VT6.2 pad.60 ; R43.1 C4.2 C5.2 111.2,25.5 R6.2 ; VD18.1@106.553,83.213 VD18.1 VD18.1@106.68,82.776 ; VD18.1@106.68,83.058 pad.72@106.68,86.868 ; DA1.3 117.33,10.686 X24.2 ; R56.1@118.844,80.645 VD17.1 118.844,86.459 ; 119.098,86.713 119.253,86.868 119.888,87.503 ; 128.397,10.543 X27.2 ; 128.397,10.668 DA3.3 ; R64.1@131.798,80.795 VD23.1 131.798,86.332 ; DA5.3 139.446,10.594 X30.2 ; R66.1 144.617,80.795 VD24.1 144.617,86.868 144.617,87.086 ; X30.2@144.526,5.588 X30.2@144.526,5.774 ; DD2.4 DD2.3 149.1,36.867 149.1,51.9 149.02,51.98 DD1.4 DD1.3 148.541,55.861 152.419,55.861 ; DA4.3 150.622,10.668 X28.2 ; VT1.2 152.419,55.861 ; R63.1@157.144,80.795 VD22.1 157.144,86.405 ; pad.56@158.2,49.9 VT13.2 ; DA2.3 161.76,10.68 X25.2 ; J1.4 169.208,68.456 169.564,68.1 ; J1.S2 169.564,68.1 ; 152.419,55.861 152.5,55.78 165.98,55.78 169.564,59.364 J1.S1 169.564,68.1
  Top Layer w2: pad.72@106.68,86.868 119.253,86.868 132.08,86.868 ; pad.72@107.061,87.249 Q2.3 ; 119.888,87.503 Q1.3 ; Q4.3 132.334,86.868 144.617,86.868 156.972,86.868 ; 144.907,87.376 Q5.3 ; Q3.3@157.607,92.583 Q3.3 157.607,86.868 159.806,86.868 ; 159.806,86.908 165.862,86.908 ; X33.2 165.862,98.933 165.862,86.908 ; C8.2 165.862,86.908
  Bottom Layer w0.5: pad.6 54.102,17.907 pad.7
  Bottom Layer w1: 1.412,17.033 X23.2 ; 1.412,39.385 X21.2 ; 1.412,61.737 X19.2 ; 1.412,72.913 X18.2 ; 1.412,95.265 X15.2 ; 1.427,84.089 X16.2 ; 1.524,28.209 X22.2 ; 1.524,50.561 X20.2 ; pad.58 18.3,99.6 pad.71 pad.70 33.1,99.6 ; U3.39 35.31,76.09 33.1,78.3 33.1,99.6 ; pad.67 pad.66 ; pad.69@54.9,99.6 44,99.6 33.1,99.6 ; pad.68@59.9,99.6 pad.65 pad.63 pad.61 pad.60 98.5,99.6 107.1,91 pad.72 ; U3.19 U3.20 C9.2@120.482,56.28 ; C6.2 102.2,25.6 ; 102.2,1.4 102.2,2.6 102.2,25.6 ; 107.15,56.33 KN1.2 KN1.1 ; pad.54 102.2,25.6 ; C9.2 120.936,54.604 121.02,54.52 124.1,54.52 ; C11.2 121.267,38.75 121.267,36.867 124.7,36.867 ; 122.428,2.95 X24.2 ; C10.2 124.1,54.52 ; C12.2 124.5,37.067 124.7,36.867 ; DD1.8 DD1.7 124.1,54.52 ; DD2.8 DD2.7 124.7,36.867 ; 133.2,2.6 133.34,2.74 X27.2 ; X30.2 144.44,2.76 144.6,2.6 ; X28.2 155.702,3.098 156.2,2.6 ; pad.56 158.3,50.2 pad.57 ; J1.S1@170,61.3 178.3,61.3
  Bottom Layer w2: 1.412,95.265 1.412,72.913 1.412,61.737 1.412,39.385 1.412,17.033 1.412,14.188 4.609,10.991 7.809,10.991 11.003,7.797 11.003,4.597 14.2,1.4 102.2,1.4 ; 102.2,2.6 133.2,2.6 144.6,2.6 156.2,2.6 163.84,2.6 X25.2 178.8,17.56 178.8,82.606 C8.2
NetA1_4: A1.4 X4.1 | length 12.8
  Top Layer w0.5: X4.1 58.801,8.128 64.643,13.97 A1.4
NetA1_5: A1.5 X4.2 | length 11.2
  Top Layer w0.5: X4.2 63.881,9.581 65.913,11.613 A1.5
NetA1_6: A1.6 X3.1 | length 11.5
  Top Layer w0.5: A1.6 67.183,11.717 69.977,8.923 X3.1
NetA1_7: A1.7 X3.2 | length 13.1
  Top Layer w0.5: A1.7 68.453,14.247 75.057,7.643 X3.2
NetA1_9: A1.9 X1.2 | length 40.6
  Top Layer w0.5: A1.9 69.723,22.733 85.967,22.733 97.409,11.291 X1.2
NetA1_10: A1.10 X1.1 | length 37.3
  Top Layer w0.5: A1.10 68.453,21.971 68.961,21.463 82.337,21.463 92.456,11.344 X1.1@92.456,5.842
NetA1_11: A1.11 X2.1 | length 32.3
  Top Layer w0.5: A1.11 67.183,21.463 68.453,20.193 76.807,20.193 85.852,11.148 X2.1@85.852,5.715
NetA1_12: A1.12 X2.2 | length 29.1
  Top Layer w0.5: A1.12 65.913,20.828 67.691,19.05 73.05,19.05 80.899,11.201 X2.2
NetA1_14: A1.14 A2.14 pad.4@57.15,27.559 pad.5 pad.121 R41.2 U1.6 U3.36 X26.1 | length 153.8
  Top Layer w0.5: pad.121@18.735,33.965 U1.6 22.535,33.965 24.7,31.8 59.132,31.8 pad.5 A1.14 ; A2.14 18.923,26.797 19.685,27.559 pad.4@57.15,27.559
  Bottom Layer w0.5: pad.121@18.7,34.2 X26.1 ; pad.4@57.15,27.559 pad.5
  Bottom Layer w1: X26.1 20.8,45.66 20.8,64.9 24.2,68.3 42.7,68.3 42.93,68.53 U3.36
NetA1_15: A1.15 A2.15 pad.2 pad.3 pad.122 R42.2 U1.5 U3.37 X26.2 | length 166.1
  Top Layer w0.5: pad.2@17.653,22.733 pad.2 A2.15 ; pad.122 21.8,30.4 ; U1.5 21.8,32.495 21.8,30.4 ; pad.3@62.103,22.606 pad.3 A1.15 62.103,27.097 58.8,30.4 21.8,30.4
  Bottom Layer w0.5: pad.2 pad.3 ; X26.2 12.8,42.74 12.8,32.3 14.7,30.4 pad.122
  Bottom Layer w1: X26.2 18.7,65.1 23.3,69.7 40.2,69.7 40.39,69.89 U3.37
NetA2_4: A2.4 X9.1 | length 13
  Top Layer w0.5: X9.1 14.097,6.604 14.097,8.397 20.193,14.493 A2.4
NetA2_5: A2.5 X9.2 | length 11.4
  Top Layer w0.5: X9.2 19.177,9.477 21.463,11.763 A2.5
NetA2_6: A2.6 X8.1 | length 11.5
  Top Layer w0.5: A2.6 22.733,11.567 25.273,9.027 X8.1
NetA2_7: A2.7 X8.2 | length 13.1
  Top Layer w0.5: A2.7 24.003,14.397 30.353,8.047 X8.2
NetA2_9: A2.9 X6.2 | length 40
  Top Layer w0.5: A2.9 25.273,23.622 25.654,23.241 40.767,23.241 52.705,11.303 X6.2
NetA2_10: A2.10 X6.1 | length 37.1
  Top Layer w0.5: A2.10 24.003,22.225 24.384,21.844 37.211,21.844 47.625,11.43 X6.1
NetA2_11: A2.11 X7.2 | length 32.4
  Top Layer w0.5: A2.11 22.733,21.717 23.876,20.574 32.258,20.574 41.529,11.303 X7.2
NetA2_12: A2.12 X7.1 | length 28.5
  Top Layer w0.5: A2.12 21.463,21.082 23.368,19.177 27.686,19.177 36.449,10.414 X7.1
NetC5_1: C5.1 U2.6 | length 4
  Top Layer w0.5: C5.1 108.1,21.3 U2.6@108.1,18.751
NetC6_1: C6.1 pad.103 pad.104 pad.105 pad.108 pad.109 U3.38 VD14.K | length 119.3
  Top Layer w1: pad.108 30.3,54.3 40.3,44.3 pad.105 ; pad.109 37.001,65.354 37.85,66.572 U3.38 ; pad.104 91.2,44.3 pad.103 ; VD14.K 92.4,18.8 92.4,30.6 C6.1
  Bottom Layer w1: pad.108 pad.109 ; pad.105 pad.104 ; C6.1 pad.103
NetDA1_1: DA1.1 R36.2 | length 3.2
  Top Layer w1: DA1.1 R36.2
NetDA1_2: DA1.2 X24.1 | length 18.4
  Top Layer w1: DA1.2@116.945,22.245 115,20.3 115,7.936 X24.1
NetDA1_4: DA1.4 pad.90 pad.91 R37.2 U3.7 | length 109.5
  Top Layer w1: U3.7 61.49,42.8 pad.91 ; pad.90 116,32.4 122.1,26.3 122.1,19.6 119.87,17.37 DA1.4 123.3,13.755
  Bottom Layer w1: pad.91 pad.90
NetDA2_1: DA2.1 R39.2 | length 3.2
  Top Layer w1: DA2.1 R39.2
NetDA2_2: DA2.2 X25.1 | length 18.2
  Top Layer w1: X25.1 159.9,7.46 159.9,20.385 DA2.2
NetDA2_4: DA2.4 pad.106 pad.107 pad.112 R38.2 U3.30 | length 211.2
  Top Layer w1: pad.112 28.6,52.3 42.8,38.1 pad.107 ; pad.106@60.9,38.1 118.2,38.1 125,31.3 161.7,31.3 166.5,26.5 166.5,19.1 164.3,16.9 DA2.4 R38.2@167.455,13.755 ; R38.2@168.355,13.755 R38.2@168.4,13.71
  Bottom Layer w1: pad.112 53.3,63.8 58.1,68.6 U3.30@58.1,71.45 ; pad.107 pad.106
NetDA3_1: DA3.1 R44.2 | length 3.2
  Top Layer w1: DA3.1@130.9,22.237 R44.2
NetDA3_2: DA3.2 X27.1 | length 18.3
  Top Layer w1: X27.1 128.26,5.94 126.3,7.9 126.3,20.103 DA3.2
NetDA3_4: DA3.4 pad.110 R45.2 U3.33 | length 177.2
  Top Layer w1: pad.110 27,49.6 42.7,33.9 116.4,33.9 122.929,27.371 131.929,27.371 133.5,25.8 133.5,18.8 130.937,16.237 DA3.4 134.255,13.71
  Bottom Layer w1: pad.110 48.7,66.9 50.55,68.75 U3.33
NetDA4_1: DA4.1 R49.2 | length 3.2
  Top Layer w1: DA4.1 153.162,25.362 R49.2
NetDA4_2: DA4.2 X28.1 | length 18.5
  Top Layer w1: X28.1 148.4,7.81 148.4,20.023 DA4.2
NetDA4_4: DA4.4 pad.88 pad.89 R48.2 U3.2 | length 151.3
  Top Layer w1: U3.2 35.31,55.99 pad.88 ; pad.89 60,36.6 117.6,36.6 124.2,30 151.9,30 155.6,26.3 155.6,18.9 153.162,16.462 DA4.4 R48.2@158,13.755
  Bottom Layer w1: pad.88 pad.89
NetDA5_1: DA5.1 R50.2 | length 3.1
  Top Layer w1: DA5.1 R50.2@141.986,25.314
NetDA5_2: DA5.2 X30.1 | length 18.5
  Top Layer w1: DA5.2@139.245,22.245 137.1,20.1 137.1,7.86 X30.1
NetDA5_4: DA5.4 R51.2 U3.3 | length 135.6
  Top Layer w1: U3.3 58.83,35.3 116.9,35.3 123.575,28.625 141.875,28.625 144.1,26.4 144.1,18.9 141.986,16.786 DA5.4 145.4,13.755
NetDA6_1: DA6.1 R52.2 | length 9.4
  Top Layer w1: DA6.1 118.999,74.041 118.999,77.467 R52.2
NetDA6_2: DA6.2 pad.76 pad.100 U3.10 | length 83.3
  Top Layer w0.5: U3.10 55.63,58.93 56.7,60 pad.100
  Top Layer w1: DA6.2 pad.76
  Bottom Layer w0.5: pad.100 62.8,61.2 65.6,64 81.4,64 97.004,79.604 122.711,79.604 pad.76
NetDA6_3: DA6.3 R54.2 | length 3.3
  Top Layer w1: DA6.3 R54.2
NetDA8_1: DA8.1 R58.2 | length 9.1
  Top Layer w1: DA8.1 157.299,74.041 157.299,77.343 159.639,79.683 R58.2
NetDA8_2: DA8.2 pad.73 U3.9 | length 126.5
  Top Layer w1: DA8.2 pad.73
  Bottom Layer w0.5: U3.9 53.09,60.79 59.1,66.8 79,66.8 94.2,82 158.658,82 pad.73
NetDA8_3: DA8.3 R60.2 | length 3.3
  Top Layer w1: DA8.3 R60.2
NetDA9_1: DA9.1 R59.2 | length 8.9
  Top Layer w1: DA9.1@134.112,74.168 131.953,74.168 131.953,77.648 R59.2
NetDA9_2: DA9.2 pad.75 U3.12 | length 92.7
  Top Layer w1: DA9.2 134.281,76.581 pad.75
  Bottom Layer w0.5: U3.12 60.71,61.51 64.2,65 80.7,65 96.1,80.4 134.9,80.4 pad.75
NetDA9_3: DA9.3 R61.2 | length 3.3
  Top Layer w1: DA9.3 R61.2
NetDA10_1: DA10.1 R62.2 | length 9.4
  Top Layer w1: DA10.1 144.645,74.041 144.645,77.467 R62.2
NetDA10_2: DA10.2 pad.74 pad.95 U3.31 | length 104.4
  Top Layer w0.5: U3.31 59.15,68 pad.95
  Top Layer w1: DA10.2 147.112,76.812 pad.74
  Bottom Layer w0.5: pad.95@81.95,67.95 95.2,81.2 146.5,81.2 pad.74
NetDA10_3: DA10.3 R65.2 | length 3.4
  Top Layer w1: DA10.3 R65.2
NetJ1_2: J1.2 R1.2 | length 4.6
  Top Layer w1: R1.2 160.262,65.956 J1.2
NetJ1_3: J1.3 R2.2 R3.1 | length 13.5
  Top Layer w1: R3.1 R2.2 165.653,62.253 167,63.6 167,65.82 J1.3
NetKN1_3: KN1.3 KN1.4 U3.17 | length 37.4
  Bottom Layer w1: U3.17 73.41,57.51 74.45,58.55 KN1.4 KN1.3
NetQ1_1: pad.10 pad.14 Q1.1 R54.1 R56.2 VD17.2 | length 12.4
  Top Layer w1: R54.1 VD17.2 R56.2@115.344,80.945 ; VD17.2@114.8,83.602 pad.14 ; pad.10 Q1.1
  Bottom Layer w1: pad.14 pad.10
NetQ1_2: Q1.2 VD15.A X31.2 | length 14.2
  Top Layer w2: Q1.2@114.808,103.096 X31.2
  Bottom Layer w2: VD15.A@114.808,109.26 X31.2
NetQ2_1: Q2.1 R55.1 VD18.2 | length 12.2
  Top Layer w1: R55.1 101.981,83.134 ; Q2.1 101.981,83.134 ; VD18.2@102.411,83.118 VD18.2@102.555,83.134 ; VD18.2@103.076,83.134 VD18.2@103.058,83.134 ; VD18.2@103.152,83.058 103.069,83.125 VD18.2@103.058,83.134 ; 101.981,83.134 VD18.2@102.555,83.134 ; VD18.2@102.555,83.134 102.886,83.17 102.998,83.182 VD18.2@103.058,83.134 ; VD18.2@102.555,83.134 VD18.2@103.058,83.134
NetQ2_2: Q2.2 VD16.A X32.2 | length 14.5
  Top Layer w2: Q2.2@102.235,102.842 X32.2
  Bottom Layer w2: VD16.A@102.235,109.26 X32.2
NetQ3_1: pad.13 pad.17 Q3.1 R60.1 R63.2 VD22.2 | length 13.1
  Top Layer w1: R60.1 VD22.2 R63.2@153.644,80.795 ; pad.13 Q3.1 ; 152.6,83.158 pad.17
  Bottom Layer w1: pad.13 pad.17
NetQ3_2: Q3.2 VD19.A X34.2 | length 14.3
  Top Layer w2: Q3.2@152.4,103.223 X34.2
  Bottom Layer w2: VD19.A@152.4,109.006 X34.2
NetQ4_1: pad.11 pad.15 Q4.1 R61.1 R64.2 VD23.2 | length 13.1
  Top Layer w1: R61.1@125.825,83.134 VD23.2 R64.2@128.298,80.795 ; 127.254,83.18 pad.15 ; pad.11 Q4.1
  Bottom Layer w1: pad.15 pad.11
NetQ4_2: Q4.2 VD20.A X35.2 | length 14.3
  Top Layer w2: Q4.2@127.127,103.223 X35.2
  Bottom Layer w2: VD20.A@127.127,109.006 X35.2
NetQ5_1: pad.12 pad.16 Q5.1 R65.1 R66.2 VD24.2 | length 13.1
  Top Layer w1: R65.1 VD24.2 ; 139.8,83.234 pad.16 ; pad.12 Q5.1 ; R66.2 VD24.2@141.267,82.984
  Bottom Layer w1: pad.16 pad.12
NetQ5_2: Q5.2 VD21.A X36.2 | length 14.2
  Top Layer w2: Q5.2@139.827,103.096 X36.2
  Bottom Layer w2: VD21.A@139.827,109.26 X36.2
NetR1_1: R1.1 U3.28 | length 96.7
  Top Layer w0.5: U3.28 63.25,70.85 64.2,69.9 153.5,69.9 157.042,66.358 R1.1
NetR2_1: R2.1 U3.29 | length 102
  Top Layer w0.5: U3.29@60.6,71.41 60.6,71.1 62.7,69 81.68,69 81.684,69.004 152.996,69.004 154.7,67.3 154.7,64.595 R2.1
NetR3_2: R3.2 VT1.3 | length 2.4
  Top Layer w1: VT1.3 R3.2
NetR4_1: pad.96 R4.1 U3.4 | length 125.2
  Top Layer w0.5: pad.96 101.4,48.5 120.9,68 152.2,68 152.419,67.781 R4.1
  Bottom Layer w0.5: U3.4 48.17,48.5 pad.96
NetR4_2: R4.2 VT1.1 | length 3.4
  Top Layer w1: VT1.1 R4.2
NetR5_1: R5.1 U2.7 | length 6
  Top Layer w0.5: U2.7 106.865,16.8 110.6,16.8 R5.1@110.835,17.035
NetR5_2: pad.92 pad.93 pad.94 R5.2 R6.1 U3.6 | length 97.4
  Top Layer w1: U3.6 60.65,41.1 pad.93 ; pad.92 112.6,28.8 112.884,28.516 112.884,27.116 112.9,27.1 112.9,21.1 111.2,21.1 ; R5.2 111.2,21.1 ; R6.1 111.2,21.1
  Bottom Layer w1: pad.94@66.15,28.85 pad.93 ; pad.94 pad.92
NetR7_1: R7.1 VT6.3 | length 2.5
  Top Layer w1: VT6.3@89.455,101.845 R7.1
NetR7_2: R7.2 X14.1 | length 7.4
  Top Layer w1: R7.2 X14.1
NetR8_1: R8.1 VT2.3 | length 2.5
  Top Layer w1: VT2.3 R8.1
NetR8_2: R8.2 X11.1 | length 7.4
  Top Layer w1: R8.2 X11.1
NetR9_1: R9.1 VT5.3 | length 2.5
  Top Layer w1: VT5.3 R9.1
NetR9_2: R9.2 X13.1 | length 7.4
  Top Layer w1: R9.2 X13.1
NetR10_1: R10.1 VT3.3 | length 2.5
  Top Layer w1: VT3.3 R10.1
NetR10_2: R10.2 X12.1 | length 7.4
  Top Layer w1: R10.2 X12.1
NetR11_1: R11.1 VT4.3 | length 2.5
  Top Layer w1: VT4.3 R11.1
NetR11_2: R11.2 X10.1 | length 7.4
  Top Layer w1: R11.2 X10.1
NetR12_1: R12.1 U3.26 VD1.K | length 40.8
  Top Layer w1: R12.1 41.355,93.3 VD1.K 43.4,89.9 49.6,83.7 59.7,83.7 68.33,75.07 U3.26
NetR12_2: R12.2 VD1.A VT2.1 | length 5
  Top Layer w1: VT2.1 R12.2 VD1.A
NetR13_1: pad.82 pad.83 R13.1 U3.25 VD2.K | length 28.8
  Top Layer w1: R13.1@57.28,93.3 VD2.K 59.7,90 pad.82 ; pad.83 70.87,75.03 U3.25
  Bottom Layer w1: pad.83 pad.82
NetR13_2: R13.2 VD2.A VT3.1 | length 5.4
  Top Layer w1: VT3.1 R13.2 VD2.A
NetR14_1: R14.1 U3.15 VD3.K | length 74.7
  Top Layer w1: R14.1@25.505,93.4 VD3.K 27.6,72.349 36.249,63.7 68,63.7 68.33,63.37 U3.15
NetR14_2: R14.2 VD3.A VT4.1 | length 5.1
  Top Layer w1: VT4.1 R14.2 VD3.A
NetR15_1: pad.114 pad.115 pad.117 pad.119 R15.1 U3.13 VD4.K | length 94.5
  Top Layer w1: U3.13 63.25,53.85 66.6,50.5 87.4,50.5 95.4,58.5 pad.119 ; R15.1 72.63,82.87 pad.114 ; R15.1@73.13,93.4 VD4.K ; pad.115 95.4,74.5 pad.117
  Bottom Layer w1: pad.114 75.1,80.4 pad.115 ; pad.119 pad.117
NetR15_2: R15.2 VD4.A VT5.1 | length 5
  Top Layer w1: VT5.1 R15.2 VD4.A
NetR16_1: R16.1 U3.21 VD5.K | length 28
  Top Layer w1: U3.21@81.1,71.59 81.1,76.8 91.1,86.8 VD5.K R16.1@89.05,93.4
NetR16_2: R16.2 VD5.A VT6.1 | length 5
  Top Layer w1: VT6.1 R16.2 VD5.A
NetR17_1: R17.1 VT9.3 | length 2.5
  Top Layer w1: VT9.3 R17.1
NetR17_2: R17.2 X12.2 | length 7.4
  Top Layer w1: R17.2@52.83,107.3 X12.2@52.83,114.735
NetR18_1: R18.1 VT7.3 | length 2.5
  Top Layer w1: VT7.3 R18.1
NetR18_2: R18.2 X10.2 | length 7.4
  Top Layer w1: R18.2 X10.2
NetR19_1: R19.1 VT11.3 | length 2.5
  Top Layer w1: VT11.3 R19.1
NetR19_2: R19.2 X14.2 | length 7.4
  Top Layer w1: R19.2 X14.2
NetR20_1: R20.1 VT10.3 | length 2.5
  Top Layer w1: VT10.3 R20.1
NetR20_2: R20.2 X13.2 | length 7.4
  Top Layer w1: R20.2 X13.2
NetR21_1: R21.1 VT8.3 | length 2.5
  Top Layer w1: VT8.3 R21.1
NetR21_2: R21.2 X11.2 | length 7.4
  Top Layer w1: R21.2 X11.2
NetR22_1: pad.84 R22.1 U3.16 VD6.K | length 79.2
  Top Layer w1: R22.1@20.5,93.4 VD6.K 22.495,75.605 36.6,61.5 pad.84
  Bottom Layer w1: pad.84 70.87,61.5 U3.16
NetR22_2: R22.2 VD6.A VT7.1 | length 5
  Top Layer w1: R22.2 VD6.A ; R22.2@20.005,97.105 VT7.1
NetR23_1: R23.1 U3.27 VD7.K | length 42.4
  Top Layer w1: R23.1@36.355,93.3 VD7.K 38.4,90.3 46.8,81.9 59.1,81.9 65.79,75.21 U3.27
NetR23_2: R23.2 VD7.A VT8.1 | length 5
  Top Layer w1: VT8.1 R23.2 VD7.A
NetR24_1: R24.1 U3.24 VD8.K | length 33.6
  Top Layer w1: R24.1@52.28,93.6 VD8.K 54.23,91.77 60.7,85.3 63.5,85.3 68.615,80.185 73.41,75.39 U3.24
NetR24_2: R24.2 VD8.A VT9.1 | length 4.7
  Top Layer w1: VT9.1 R24.2 VD8.A
NetR25_1: pad.113 pad.116 pad.118 pad.120 R25.1 U3.14 VD9.K | length 86.2
  Top Layer w1: U3.14 65.79,54.71 67.5,53 86.1,53 92.3,59.2 pad.120 ; R25.1 67.63,84.07 pad.113 ; R25.1@68.13,93.4 VD9.K ; pad.116 92.3,73.2 pad.118
  Bottom Layer w1: pad.113 pad.116 ; pad.120 pad.118
NetR25_2: R25.2 VD9.A VT10.1 | length 4.9
  Top Layer w1: VT10.1 R25.2 VD9.A
NetR26_1: R26.1 U3.23 VD10.K | length 31.4
  Top Layer w1: U3.23@76,71.57 76,89.1 77.989,89.1 78.043,89.046 79.082,89.046 79.136,89.1 82.1,89.1 85.9,92.9 VD10.K R26.1@84.005,93.4
NetR26_2: R26.2 VD10.A VT11.1 | length 4.9
  Top Layer w1: VT11.1 R26.2 VD10.A
NetR27_1: R27.1 VT12.3 | length 2.5
  Top Layer w1: VT12.3 R27.1
NetR27_2: R27.2 X14.3 | length 7.4
  Top Layer w1: R27.2 X14.3
NetR28_1: R28.1 R29.1 R30.1 R31.1 VT14.3 | length 110.1
  Top Layer w1: VT14.3@15.955,101.805 15.955,103 ; R28.1 15.955,103 ; 29,117.9 29,106.1 R29.1@31,104.1 ; R30.1 46.2,104.2 44.7,105.7 44.7,117.9 ; R31.1 61.8,104.3 60.7,105.4 60.7,115.4 58.2,117.9 44.7,117.9 ; 15.955,103 14.7,103 13.6,104.1 13.6,116.3 15.2,117.9 44.7,117.9
NetR28_2: R28.2 X10.3 | length 7.4
  Top Layer w1: R28.2 X10.3
NetR29_2: R29.2 X11.3 | length 7.4
  Top Layer w1: R29.2 X11.3
NetR30_2: R30.2 X12.3 | length 7.4
  Top Layer w1: R30.2@47.73,107.43 X12.3
NetR31_2: R31.2 X13.3 | length 7.4
  Top Layer w1: R31.2 X13.3
NetR32_1: pad.80 pad.81 R32.1 U3.22 VD11.K | length 24.8
  Top Layer w1: U3.22 pad.80 ; pad.81 78.562,93.843 79.005,93.4 VD11.K
  Bottom Layer w1: pad.80 pad.81
NetR32_2: R32.2 VD11.A VT12.1 | length 4.9
  Top Layer w1: VT12.1 R32.2 VD11.A
NetR33_1: R33.1 X17.2 | length 7.6
  Top Layer w1: R33.1 166.96,53.24 X17.2
NetR33_2: R33.2 VT13.3 | length 3.3
  Top Layer w1: VT13.3 R33.2
NetR34_1: pad.98 pad.99 R34.1 U3.8 VD12.K | length 109.5
  Top Layer w1: U3.8@50.95,55.85 59.554,47.246 111.246,47.246 114.2,50.2 pad.99 ; pad.98 151.25,50.55 VD12.K 154.8,50.55 R34.1
  Bottom Layer w1: pad.99 150.7,50.2 pad.98
NetR34_2: R34.2 VD12.A VT13.1 | length 5.5
  Top Layer w1: VD12.A R34.2 VT13.1
NetR35_1: pad.86 pad.87 R35.1 U3.32 VD13.K | length 49.3
  Top Layer w1: VD13.K@15.05,93.2 R35.1 17.2,89.1 pad.87 ; pad.86 37.61,87 U3.32
  Bottom Layer w1: pad.87@19.3,87 pad.86
NetR35_2: R35.2 VD13.A VT14.1 | length 5.1
  Top Layer w1: VT14.1 VD13.A 15.55,96.4 R35.2
NetR40_2: pad.97 pad.102 R40.2 R43.2 U3.5 | length 86.3
  Top Layer w1: U3.5 59.51,39.7 pad.102 ; R43.2 pad.97 R40.2 R40.2@111.4,30.6
  Bottom Layer w1: pad.97 pad.102
NetR55_2: pad.77 pad.101 R55.2 U3.11 | length 54.8
  Top Layer w0.5: U3.11 58.2,56.31 58.2,57.9 59.1,58.8 pad.101 ; pad.77 100,79.858 R55.2
  Bottom Layer w0.5: pad.101 64.4,61.2 66.2,63 82.5,63 98.1,78.6 pad.77
NetU2_1: pad.33 pad.34 pad.37 pad.38 pad.41 U2.1 U2.2 X5.1 | length 17.6
  Top Layer w3: X5.1 105.9,6.44 105.9,13.9
  Bottom Layer w3: X5.1 105.946,6.486 105.946,13.9
NetU2_3: pad.35 pad.36 pad.39 pad.40 pad.42 U2.3 U2.4 X5.2 | length 17.6
  Top Layer w3: U2.4@109.2,13.9 109.2,6.34 X5.2
  Bottom Layer w3: 109.2,14 109.2,6.34 X5.2
NetU3_34: U3.34 X29.1 | length 18.2
  Top Layer w1: X29.1 38.36,83.84 48.01,74.19 U3.34
NetU3_35: U3.35 X29.2 | length 13.7
  Top Layer w1: X29.2 41.14,78.76 45.47,74.43 U3.35
VCC: C8.1 DA6.4 DA8.4 DA9.4 DA10.4 DD1.1 DD1.2 DD2.1 DD2.2 pad.28 pad.29 pad.30 pad.31 VD15.K VD19.K VD20.K VD21.K X31.1 X33.1 X34.1 X35.1 X36.1 | length 223.1
  Top Layer w1: DA6.4 pad.31 ; DA9.4 pad.30 ; DA10.4 pad.29@141.579,74.041 ; DD1.1 DD1.2 145.54,63.44 ; DD2.2 DD2.1 145.473,48.327 145.3,48.5 145.3,63.2 ; DA8.4 pad.28 ; 145.3,63.2 145.54,63.44 ; 145.3,63.2 145.3,63.44 145.54,63.44
  Top Layer w2: X34.1 166.751,104.013 X33.1 174.879,104.013 177.292,101.6 177.292,93.892 175.308,91.908 C8.1
  Bottom Layer w1: pad.31 129.1,74.02 pad.29 pad.28 ; DD1.1 147.2,67.6 151.3,71.7 154.441,71.7 pad.28 ; C8.1 171.8,89.21 171.8,85.4 160.441,74.041 pad.28
  Bottom Layer w2: 119.8,117.983 131.953,117.983 ; VD15.K@119.888,109.26 X31.1 119.888,117.729 ; VD20.K@132.207,109.006 X35.1 132.207,117.983 152.4,117.983 ; VD21.K@144.907,109.18 X36.1 144.907,117.729 ; 153.035,117.983 153.035,117.729 X34.1 VD19.K@157.48,109.006
pads on no net: A1.13 A2.13 U3.1 U3.18 U3.40

## Polygon pours and split planes (outlines as drawn)
GND on Bottom Layer "Bottom Layer-No Net" (solid, pour order 6): 0.1,119.9 180.1,119.9 180.1,0.1 180,0 0,0
GND on Top Layer "Bottom Layer-No Net" (solid, pour order 8): 0,119.9 0,0 180.1,0 180.1,119.9

## Silkscreen, mask and mechanical layers (free items; w line width, h text height)
Mechanical 15:
  lines w0.254: 0,0 0,119.9 180.1,119.9 180.1,0 119.9,0 0,0

## Text inside footprints (layer, text, board x,y; h text height)
DD1: Top Overlay "-" at 144.45,53.73 h1.5 r270; Top Overlay "+" at 144.45,65.23 h1.5 r270; Top Overlay "+" at 129.45,65.23 h1.5 r270; Top Overlay "OUT" at 127.7,60.98 h1.5 r270; Top Overlay "IN" at 146.2,59.98 h1.5 r270; Top Overlay "-" at 129.45,53.73 h1.5 r270
DD2: Top Overlay "-" at 144.577,36.077 h1.5 r270; Top Overlay "+" at 144.577,47.577 h1.5 r270; Top Overlay "+" at 129.577,47.577 h1.5 r270; Top Overlay "OUT" at 127.827,43.327 h1.5 r270; Top Overlay "IN" at 146.327,42.327 h1.5 r270; Top Overlay "-" at 129.577,36.077 h1.5 r270